# EAGLE board eeZeePower (EAGLE 6.4)
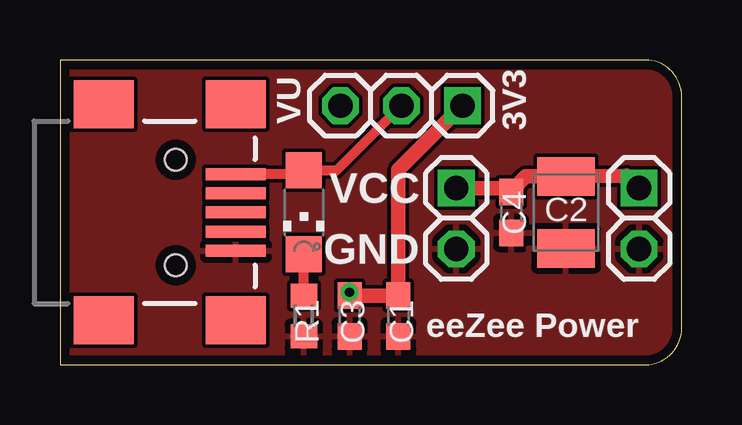
[diagram p0: board, top side]
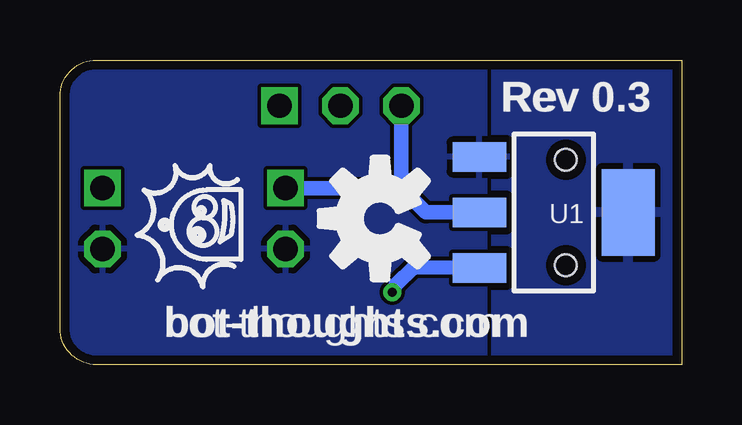
[diagram p1: board, bottom side, seen from below]

Size 25.91 x 12.7 mm. Coordinates in mm from the lower left corner, seen from the top.
Outline: 0,0 24.38,0 arc90 25.91,1.52 25.91,11.18 arc90 24.38,12.7 18.8,12.7 0,12.69 0,0
Copper layers (1*16): Top 0.0356mm / dielectric 1.5011mm / Bottom 0.0356mm
Design rules "LaenPCBOrder *": minimum track width 6mil, minimum drill 13mil, track to track 6mil, track to pad 6mil, pad to pad 6mil, via to via 6mil, smd to smd 6mil, copper to edge 15mil, drill to drill 6mil, minimum pad ring 7mil, minimum via ring 7mil, stop-mask expansion 4mil, vias tented up to drill 20mil, thermal gap 10mil

## Footprints (pad centres in the part's own frame; a part is rotated, then mirrored left to right if it is on the bottom)
C0603 = smd 1.1 x 1: 1 -0.85,0; 2 0.85,0
SMC_B = smd 1.6 x 2.4: + -1.5,0; - 1.5,0
USB-MINIB = smd 2.5 x 0.5: D+ 2.5,0; D- 2.5,0.8; GND 2.5,-1.6; ID 2.5,-0.8; VBUS 2.5,1.6 | smd 2.5 x 2: MTN1 -3,4.5; MTN2 2.5,4.5; MTN3 -3,-4.5; MTN4 2.5,-4.5 | hole 0.9: 0,2.2; 0,-2.2
1X02-S = drill 1.016 square: 1 -1.27,0 | drill 1.016 octagon: 2 1.27,0
1X03-S = drill 1.016 square: 1 -2.54,0 | drill 1.016 octagon: 2 0,0; 3 2.54,0
CHIPLED_1206 = smd 1.5 x 1.5: A 0,-1.75; C 0,1.75
R0603 = smd 1 x 1.1: 1 -0.85,0; 2 0.85,0
SOT223 = smd 1.219 x 2.235: 1 -2.311,-3.099; 2 0,-3.099; 3 2.311,-3.099 | smd 3.6 x 2.2: 4 0,3.099

## Placement (x,y rotation side)
C1  0.1uF  [C0603]  14.1,2.03 270 top
C2  100uF  [SMC_B]  21.08,6.35 270 top
C3  10uF  [C0603]  12.06,2.03 270 top
C4  0.1uF  [C0603]  18.8,6.35 270 top
JP1  USBSMD  [USB-MINIB]  4.83,6.35 0 top
JP3  [1X02-S]  16.51,6.1 270 top
JP4  [1X02-S]  24.13,6.1 270 top
JP10  SEL  [1X03-S]  14.22,10.79 180 top
LED1  [CHIPLED_1206]  10.16,6.35 180 top
R1  [R0603]  10.16,2.03 90 top
U1  [SOT223]  5.33,6.35 270 bottom

## Library data of the parts
C1-C4 = rcl
JP1 U1 = SparkFun
JP3 JP4 JP10 = pinhead-2
LED1 = led
R1 = resistor

## Nets
GND: C1.2 C2.- C3.2 C4.2 JP1.GND JP3.2 JP4.2 R1.1 U1.1
HEATSINK: U1.4
N$5: LED1.C R1.2
VBUS: JP1.VBUS JP10.2 LED1.A
VIN: C1.1 C3.1 JP10.1 U1.3
VOUT: C2.+ C4.1 JP3.1 JP4.1 JP10.3 U1.2

## Tracks (layer width: path | path; a pad name or v marks a point on that pad's centre or on a via)
GND
  pour Top (rank 3): 0,12.7 24.38,12.7 arc-90 25.91,11.18 25.91,1.52 arc-90 24.38,0 0,0
  pour Bottom (rank 2): 0,12.7 24.38,12.7 arc-90 25.91,11.18 25.91,1.52 arc-90 24.38,0 0,0
HEATSINK
  pour Bottom (isolate 0.305): 0.13,12.45 7.75,12.45 7.75,0.25 0.13,0.25
N$5
  Top 0.406: R1.2 LED1.C
VBUS
  Top 0.406: JP1.VBUS 9.48,7.95 LED1.A 11.53,8.1 JP10.2
VIN  (via drill 0.38)
  Top 0.61: JP10.1 14.1,8.13 C1.1 C3.1 v12.06,3.02
  Bottom 0.61: U1.3 11.18,4.06 11.91,3.33 v12.06,3.02
VOUT
  Top 0.61: JP4.1 24.11,7.34 23.62,7.87 C2.+ 19.42,7.85 18.91,7.34 C4.1 18.71,7.37 JP3.1
  Bottom 0.61: U1.2 10.67,6.35 11.68,7.37 | 11.68,7.37 JP10.3 | 11.68,7.37 JP3.1

## Text on the board
bPlace: Rev 0.3 | bot-thoughts.com
tValues: 3V3 | VU | VCC | GND | eeZee Power
tsilk: 3V3 | VU | VCC | GND | eeZee Power
bsilk: Rev 0.3 | bot-thoughts.com